# Altium PCB project_V3.PcbDoc
Units mil, origin at the board's own origin, x right, y up, seen from the top; angles counter-clockwise.
Board outline 1284.21 x 2285.52 mil, 2 copper layers (Top Layer, Bottom Layer); 38 components, 28 nets, 190 pads, 46 vias.
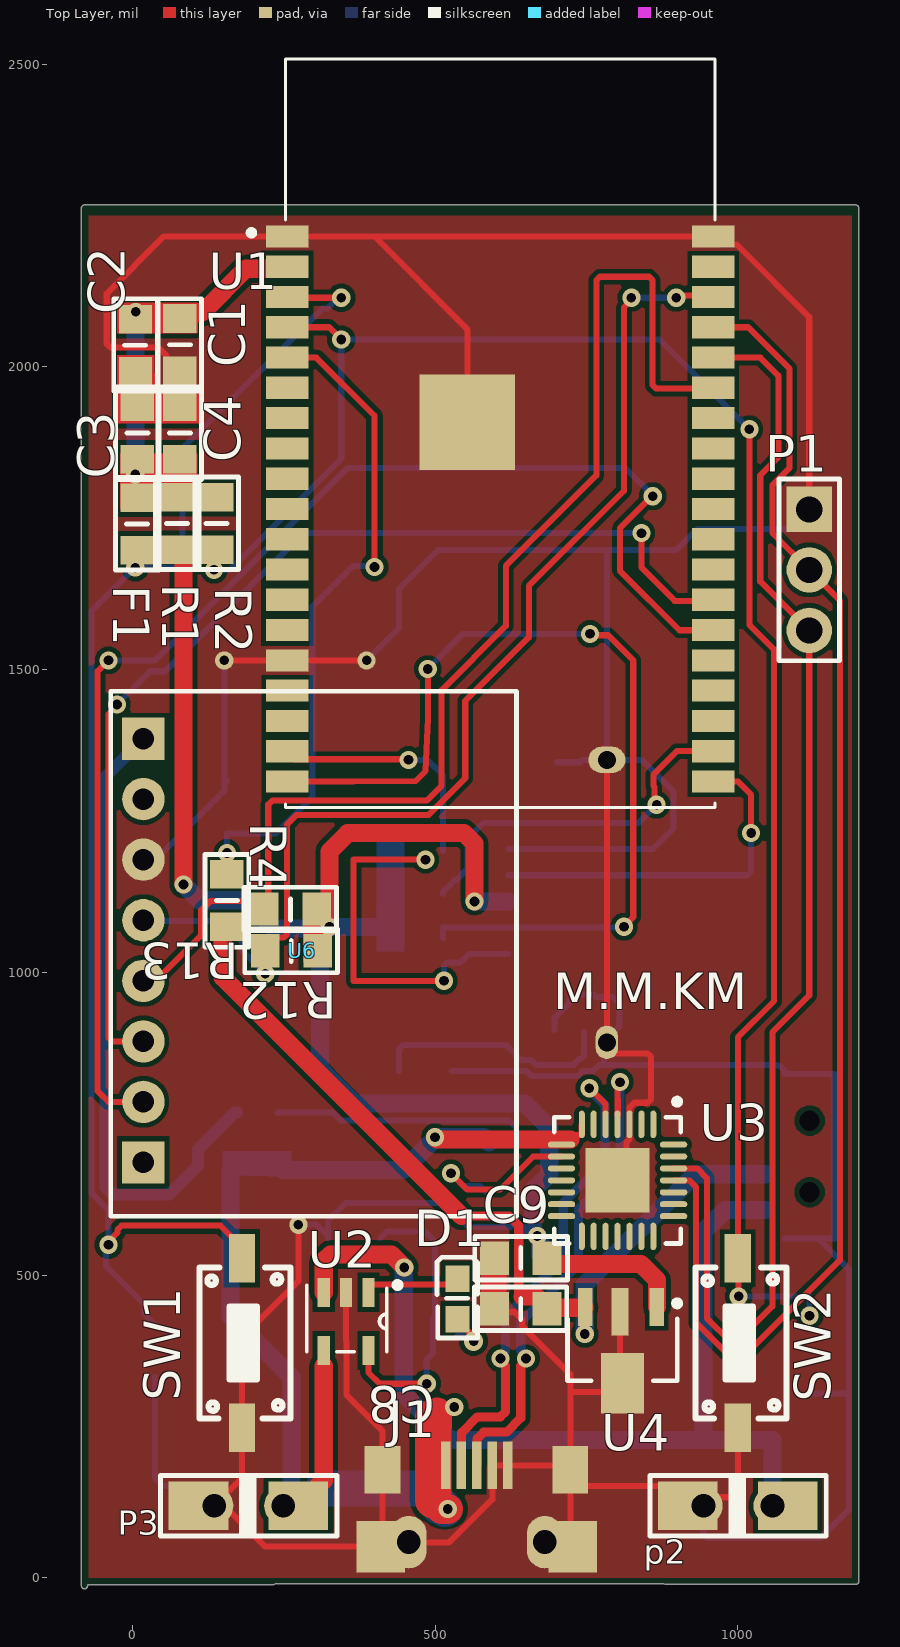
[diagram p0: Top Layer view]
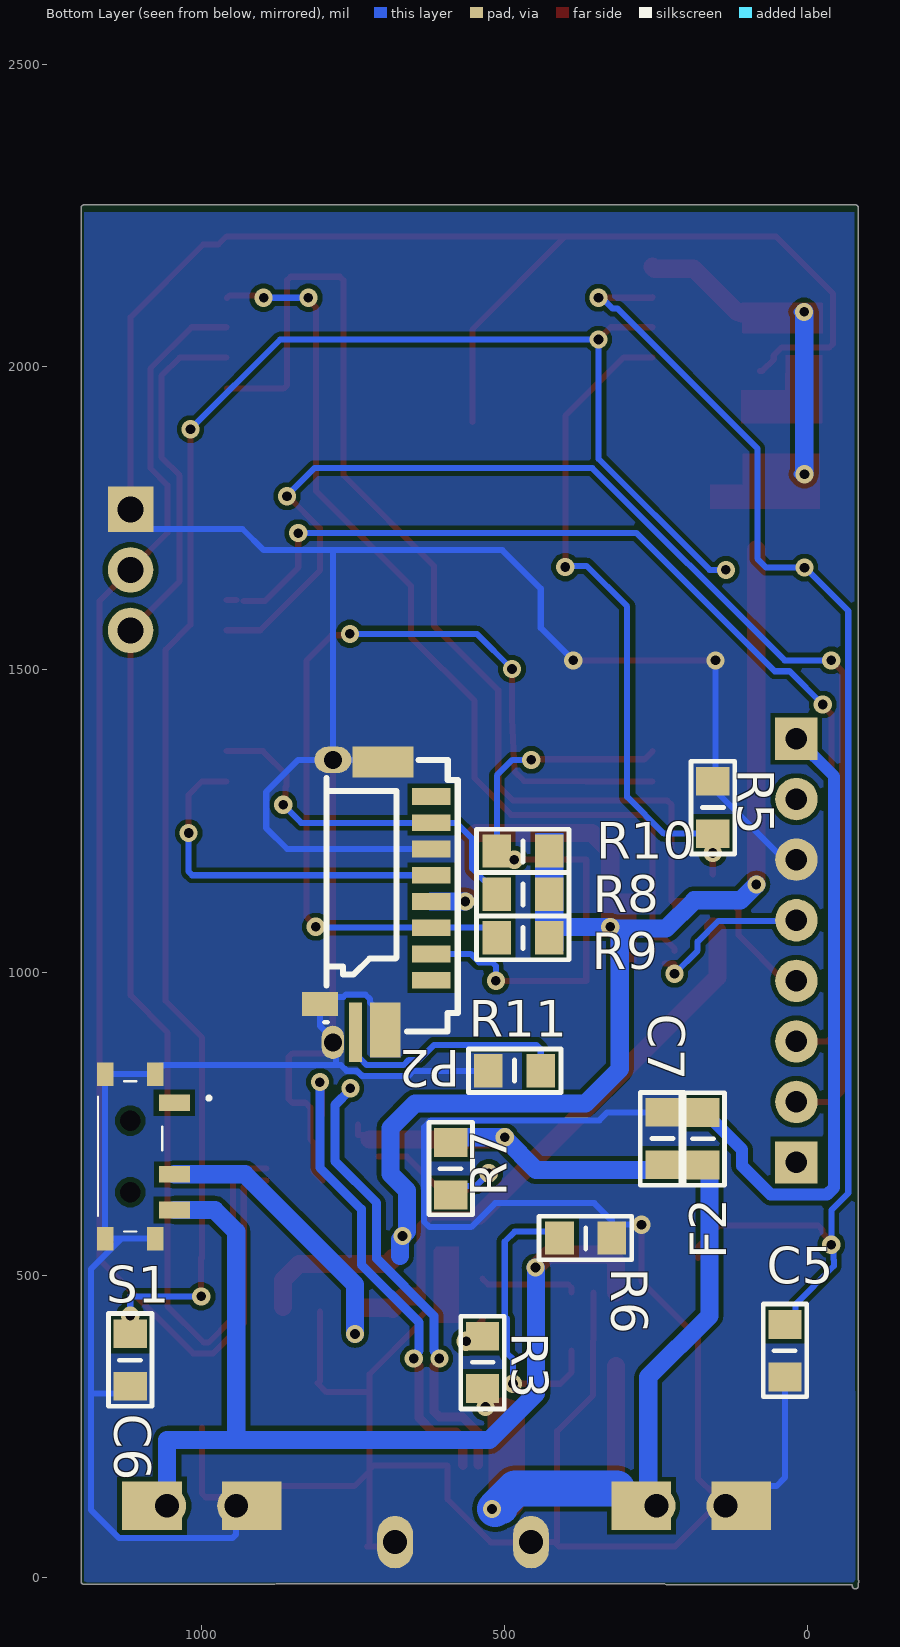
[diagram p1: Bottom Layer view, seen from below]

## Layer stack, top to bottom
Top Solder: solder mask 0.4, Solder Resist, Dk 3.5
Top Layer: signal copper 1.4
Dielectric 1: dielectric 12.6, FR-4, Dk 4.8
Bottom Layer: signal copper 1.4
Bottom Solder: solder mask 0.4, Solder Resist, Dk 3.5

## Board outline
-83.9,-8.34 cw(c-79.53,-5.87) -83.9,-3.41 -83.9,2262.37 cw(c-78.89,2262.37) -78.89,2267.39 238.19,2267.39 880.54,2267.39 1194.65,2267.39 cw(c1194.65,2262.37) 1199.66,2262.37 1199.66,-5.63 cw(c1194.65,-5.63) 1194.65,-10.64 879.89,-10.64 877.13,-9.82 236.46,-9.82 233.36,-10.89 -73.87,-10.89 -73.87,-13.14 cw(c-78.89,-13.14)

## Design rules (kind name [scope] priority, off if disabled: settings)
Clearance Clearance_1 [All] p1: gap=8 ignorepadtopadclearanceinfootprint=TRUE
Clearance POLYGON [InPolygon] p2: gap=25 ignorepadtopadclearanceinfootprint=FALSE except(0: Arc-Hole Track-Hole SMDPad-Hole THPad-Hole Via-Hole Fill-Hole Poly-Hole Region-Hole Text-Hole)
Clearance [All] p3: gap=8 ignorepadtopadclearanceinfootprint=FALSE except(12: Arc-Fill Arc-Poly Arc-Region Track-Fill Track-Poly Track-Region SMDPad-Fill SMDPad-Poly SMDPad-Region THPad-Fill THPad-Poly THPad-Region Via-Fill Via-Poly Via-Region Fill-Fill Fill-Poly Fill-Region Poly-Poly Poly-Region Region-Region)
ComponentClearance [All] p1: gap=0 collisioncheckmode=3 verticalgap=0 showdistances=FALSE
DiffPairsRouting [All] p1: maxlimit=10 minlimit=10 mostfreqgap=10 toplayer_minwidth=15 toplayer_maxwidth=15 toplayer_prefwidth=15 bottomlayer_minwidth=15 bottomlayer_maxwidth=15 bottomlayer_prefwidth=15 maxuncoupledlength=500
HoleSize [IsVia] p1: absolutevalues=TRUE maxlimit=30 minlimit=9 maxpercent=80.000 minpercent=20.000
PlaneConnect [All] p1: planeconnectstyle=Direct reliefexpansion=20 reliefentries=4 reliefconductorwidth=10 reliefairgap=10
PolygonConnect [All] p1: connectstyle=Direct reliefconductorwidth=10 reliefentries=4 polygonreliefangle="90 Angle" airgapwidth=10
RoutingVias [All] p1: holewidth=28 width=50 viastyle="Through Hole" minholewidth=28 minwidth=50 maxholewidth=28 maxwidth=50
SolderMaskExpansion [All] p1: expansion=4 istentingtop=FALSE
UnRoutedNet [All] p1: checkbadconnections=TRUE
Width [All] p1: maxlimit=196.85 minlimit=10 preferedwidth=10 minimp=50.000000 maximp=50.000000 favimp=50.000000
25 further rules are at their usual default settings.

## Classes and differential pairs
differential pair D: +D_P -D_N

## Components (designator, comment, footprint, x,y, rotation, side; value= is the part's Value field where it differs from the comment)
C1 "22uF" "0805 - CAP - duplicate" 78.4,2036.53 r90 top locked
C2 "100nF" "0805 - CAP - duplicate" 5.37,2035.53 r270 top locked
C3 "100nF" "0805 - CAP - duplicate" 78.4,1890.49 r90 top locked
C4 "100nF" "0805 - CAP - duplicate" 8.41,1890.49 r90 top locked
C5 "1uF" "0805 - CAP - duplicate" 37.33,375.18 r270 bottom locked
C6 "1uF" "0805 - CAP - duplicate" 1118.46,359.66 r270 bottom locked
C7 "10uF" "0805 - CAP - duplicate" 240.1,725.49 r90 bottom locked
C8 "10uF" "0805 - CAP - duplicate" 641.57,444.57 r0 top locked
C9 "10uF" "0805 - CAP - duplicate" 641.57,528 r180 top locked
D1 "RED" "0603 -LED_GREEN" 536.82,427.21 r90 top locked
F1 "Ferrite Bead" "0805 - CAP - duplicate" 74.57,1741.24 r270 top locked value=1K
F2 "Ferrite Bead" "0805 - CAP - duplicate" 173.2,725.31 r90 bottom locked value=1K (schematic designator F3)
J1 "MICRO USB 5PIN" "MICRO USB Dip_5pin - duplicate" 517.82,186 r0 top locked
P1 "Header 3" HDR1*3 1117.94,1764.69 r270 top locked
p2 "Battery" "HDR1X2_SMD - THD" 1000,119.17 r0 top locked
P2 "NANO SD CARD (MUP M617-2)" NANO_SDCARD 585.55,1350.7 r270 bottom locked
P3 "5V  input" "HDR1X2_SMD - THD" 191.82,119.17 r0 top locked
R1 "10k" "0805 - CAP - duplicate" 8.41,1740.64 r270 top locked
R2 "10k" "0805 - CAP - duplicate" 139.28,1741.24 r270 top locked
R3 "1K" "0805 - CAP - duplicate" 536.82,356.15 r90 bottom locked
R4 "100K" "0805 - CAP - duplicate" 156.26,1118.58 r90 top locked
R5 "420K" "0805 - CAP - duplicate" 156.26,1272.48 r90 bottom locked
R6 "1.65K" "0805 - CAP - duplicate" 366.38,561.37 r180 bottom locked
R7 "1K" "0805 - CAP - duplicate" 589.18,675.71 r270 bottom locked
R8 "47K" "0805 - CAP - duplicate" 469.81,1129.09 r180 bottom locked
R9 "47K" "0805 - CAP - duplicate" 469.81,1056.94 r180 bottom locked
R10 "47K" "0805 - CAP - duplicate" 469.81,1200.36 r180 bottom locked
R11 "47K" "0805 - CAP - duplicate" 483.91,837.51 r0 bottom locked
R12 "10k" "0805 - CAP - duplicate" 262.72,1035.5 r0 top locked
R13 "10k" "0805 - CAP - duplicate" 261.38,1104.62 r0 top locked
S1 "MSK12C02" SW_ON-OFF_MSK12C02 1045.46,785.06 r270 bottom locked
SW1 "KFC-6X6X4.5-4P" PUSH_BUTTON_SMD 181,388 r90 top locked
SW2 "KFC-6X6X4.5-4P" PUSH_BUTTON_SMD 1000,388 r90 top locked
U1 "ESP32_WROVER" ESP32-WROVER-I 607.64,1765.28 r0 top locked
U2 "LTC4054" TSOT-23-5 353.12,423.65 r270 top locked
U3 "CP2102" QFN28 801.35,656.53 r270 top locked
U4 "RT9166A-33GX" "SOT89 (RT9166)" 868.32,443.65 r180 top locked
U6 "GY-87" GY-87 -35.58,597.11 r90 top locked

## Footprints (in the part's own frame and the unit in brackets; to place one, negate y for a bottom-side part, rotate by r counter-clockwise, add the part's x,y. Pads: shape width x height; smd on the part's side, far side on the other; paste and mask are expansions set on the pad)
"0603 -LED_GREEN" [mm]
  rect 1.1x1 smd: 1(0,0) 2(1.7,0)
  silkscreen extent -0.79,-0.84 2.6,0.85, body extent -0.16,-0.65 1.86,0.6, height 1.1
"0805 - CAP - duplicate" [mm]
  rect 1.2x1.4 smd: 1(-1.1,0) 2(1.1,0)
  silkscreen extent -1.96,-0.91 1.93,0.91, body extent -1.01,-0.6 0.99,0.65, height 0.3
ESP32-WROVER-I [mm]
  rect 1.778x0.93 smd: 1(-8.937,11.43) 2(-8.937,10.16) 3(-8.937,8.89) 4(-8.937,7.62) 5(-8.937,6.35) 6(-8.937,5.08) 7(-8.937,3.81) 8(-8.937,2.54) 9(-8.937,1.27) 10(-8.937,0) 11(-8.937,-1.27) 12(-8.937,-2.54) 13(-8.937,-3.81) 14(-8.937,-5.08) 15(-8.937,-6.35) 16(-8.937,-7.62) 17(-8.937,-8.89) 18(-8.937,-10.16) 19(-8.937,-11.43) 20(8.937,-11.43) 21(8.937,-10.16) 22(8.937,-8.89) 23(8.937,-7.62) 24(8.937,-6.35) 25(8.937,-5.08) 26(8.937,-3.81) 27(8.937,-2.54) 28(8.937,-1.27) 29(8.937,0) 30(8.937,1.27) 31(8.937,2.54) 32(8.937,3.81) 33(8.937,5.08) 34(8.937,6.35) 35(8.937,7.62) 36(8.937,8.89) 37(8.937,10.16) 38(8.937,11.43)
  rect 4x4 smd paste-3: 39(-1.38,3.64)
  silkscreen extent -10.56,-12.53 9,18.87, body extent -9,-12.52 9,18.88, height 3.65
GY-87 [mil]
  rect 70x70 hole 35.43: 1(789,-54) 8(89,-54)
  round 70 hole 35.43: 2(689,-54) 3(589,-54) 4(489,-54) 5(389,-54) 6(289,-54) 7(189,-54)
  round 0 on Mech13: ""(753.46,-577.58)
  silkscreen extent 0,-670 867,0, body extent 36,-614 836,-14, height 220
HDR1*3 [mil]
  rect 75x75 hole 43: 1(0,0)
  round 75 hole 43: 2(100,0) 3(200,0)
  silkscreen extent -50,-50 250,50, body extent -50,-49 250,49, height 336
"HDR1X2_SMD - THD" [mm]
  rect 2.5x2.032 smd: 1(-2.095,0) 2(2.095,0)
  rect 2.5x2.032 smd far side: 1(-2.095,0) 2(2.095,0)
  round 1.6 hole 1: 1(-1.435,0) 2(1.461,0)
  silkscreen extent -3.69,-1.3 3.71,1.3
"MICRO USB Dip_5pin - duplicate" [mm]
  round 0 on Drill Drawing: 0(-0.741,-1.063)
  rect 0.4x2 smd: 1(0,0) 2(0.651,0.008) 3(1.3,0) 4(1.95,0) 5(2.6,0)
  rect 2.032x2.159 smd: 5(-2.728,-3.41) 5(5.323,-3.41)
  rect 1.5x2 smd: 5(-2.652,-0.185) 5(5.222,-0.185)
  oval 1.5x2.2 hole 1: 5(-1.554,-3.222) 5(4.149,-3.222)
  body extent -4.59,-30.64 7.41,0.29, height 5.5
NANO_SDCARD [mm]
  rect 0.7x1.6 smd: 1(9.233,-0.909) 2(8.133,-0.909) 3(7.033,-0.909) 4(5.933,-0.909) 5(4.833,-0.909) 6(3.733,-0.909) 7(2.633,-0.909) 8(1.533,-0.909)
  rect 2.5x0.55 smd: CD1(11.418,-4.08)
  rect 1.016x1.5 smd: CD2(10.236,-5.572)
  oval 1.1x1.55 hole 0.75: SHELL(-0.007,-5.035)
  rect 1.3x2.57 smd: SHELL(0.093,-2.935)
  rect 2.3x1.27 smd: SHELL(11.318,-2.845)
  oval 1.397x0.94 hole 0.75: SHELL(11.843,-5.035)
  silkscreen extent -0.01,-5.38 11.39,0.2, body extent 0.06,-15.75 11.46,0.02, height 3.85
PUSH_BUTTON_SMD [mil]
  rect 80x43.31 smd: 1(140,0) 2(-140,0)
  silkscreen extent -125,-80 125,70, body extent -153,-73 162,64, height 165
QFN28 [mm] "QFN, 28-Leads, Body 5/00x5/00mm, Pitch 0/50mm, Thermal Pad 3/13x3/20mm, IPC Low Density"
  oval 1.15x0.25 smd: 1(-2.35,1.5) 2(-2.35,1) 3(-2.35,0.5) 4(-2.35,0) 5(-2.35,-0.5) 6(-2.35,-1) 7(-2.35,-1.5) 15(2.35,-1.5) 16(2.35,-1) 17(2.35,-0.5) 18(2.35,0) 19(2.35,0.5) 20(2.35,1) 21(2.35,1.5)
  oval 0.25x1.15 smd: 8(-1.5,-2.35) 9(-1,-2.35) 10(-0.5,-2.35) 11(0,-2.35) 12(0.5,-2.35) 13(1,-2.35) 14(1.5,-2.35) 22(1.5,2.35) 23(1,2.35) 24(0.5,2.35) 25(0,2.35) 26(-0.5,2.35) 27(-1,2.35) 28(-1.5,2.35)
  rect 2.7x2.7 smd: EXP(0,0)
  silkscreen extent -3.42,-2.65 2.65,2.65, body extent -2.5,-2.5 2.5,2.5, height 1
"SOT89 (RT9166)" [mm] "SOT89, 3-Leads, Body 4.5x2.4 mm, Pitch 1.5mm, Lead Span 4.1mm, IPC High Density"
  rect 0.6x1.6 smd: 1(3.05,-0.1) 2(0.05,-0.1)
  rect 1.8x2.54 smd: 3(1.5,3.1)
  rect 0.7x2 smd: 3(1.6,0.1)
  silkscreen extent -0.93,-0.37 3.8,3, body extent -0.8,0.4 3.8,3, height 1.6
SW_ON-OFF_MSK12C02 [mm]
  rect 0.7x1.3 smd: A1(0.011,-0.004) B1(3.011,-0.004) C1(4.511,-0.004)
  round 0.425 hole 0.85 unplated: MH1(0.761,-1.854) MH2(3.761,-1.854)
  rect 1x0.7 smd: MP1(5.711,-0.804) MP2(5.711,-2.904) MP3(-1.189,-2.904) MP4(-1.189,-0.804)
  silkscreen extent -0.89,-3.2 5.41,1.5, body extent -1.69,-4.75 6.21,0.64, height 1.4
TSOT-23-5 [mil]
  rect 48x20 smd: 1(-48,37) 2(-48,0) 3(-48,-37) 4(48,-37) 5(48,37)
  silkscreen extent -65,-65 50,90, body extent -64,-60 64,60, height 43

## Part data
C1 C2 C3 C4 C5 C6 C8 C9: library part Cap, "Capacitor", LatestRevisionDate=17-Jul-2002, LatestRevisionNote="Re-released for DXP Platform.", PackageDescription="Radial Cap, Thru-Hole; 2 Leads; 0.3 in Pin Spacing", PackageReference=RAD-0.3, Published=8-Jun-2000, Publisher="Altium Limited"
C7: library part "C SMD", "Ceramic Chip Capacitor - Standard", PackageDocument=Mar-2001, Code_IPC="1608 [0603]", Code_JEITA=0603, ComponentLink1Description="Manufacturer Link", ComponentLink1URL=http://www.kemet.com/, ComponentLink2Description=Datasheet, ComponentLink2URL=http://www.kemet.com/kemet/web/homepage/kechome.nsf/vapubfilesname/F3102TA.pdf/$file/F3102TA.pdf, DatasheetDocument=Mar-2001, LatestRevisionDate=19-Mar-2004, LatestRevisionNote="Silkscreen size reduced.", Note="Footprint corresponds to dimensions for bulk cassette packaging. This case size has tightened tolerances.", PackageReference=0603, Published=17-Jul-2002, Publisher="Altium Limited"
D1: library part "LED SMD"
F1 F2: library part Res2, "Resistor", LatestRevisionDate=17-Jul-2002, LatestRevisionNote="Re-released for DXP Platform.", PackageReference=AXIAL-0.4, Published=8-Jun-2000, Publisher="Altium Limited"
J1: "USB 1.1, Right Angle, Thru-Hole, Series A, Reverse Type, Receptacle, 4 Position, Black", PackageDocument=08-Sep-2003, ComponentLink1Description="Manufacturer Link", ComponentLink1URL=http://www.tycoelectronics.com/, ComponentLink2Description="Packaging Specification", ComponentLink2URL=http://ecommas.tycoelectronics.com/commerce/DocumentDelivery/DDEController?Action=showdoc&DocId=Customer+Drawing%7F440314%7FF%7Ftif%7FEnglish%7FC_440314_F.tif, ContactMaterial="Copper Alloy", ContactPlating="Gold (30)", DatasheetDocument=08-Sep-2003, DrillSize="Corresponds to nominal value.", HousingMaterial="Glass-Filled Thermoplastic", PackageReference=440314, PanelGround=Without, PCB_Layout="Complies with manufacturer's recommendation.", Published=15-Jul-2004, Publisher="Altium Limited", TerminationLength="2.79mm [0.110in.]"
P1: "Header, 3-Pin", LatestRevisionDate=17-Jul-2002, LatestRevisionNote="Re-released for DXP Platform.", Publisher="Altium Limited"
p2: "Multicell Battery", LatestRevisionDate=17-Jul-2002, LatestRevisionNote="Re-released for DXP Platform.", PackageDescription="Battery; 2 Leads", PackageReference=BAT-2, Published=24-Mar-1999, Publisher="Altium Limited"
P2: library part Nano_SDCard
P3: library part "Header 2", "Header, 2-Pin", LatestRevisionDate=17-Jul-2002, LatestRevisionNote="Re-released for DXP Platform.", Publisher="Altium Limited"
R1 R2 R3 R4 R5 R6 R7 R8 R9 R10 R11 R12 R13: library part Res1, "Resistor", LatestRevisionDate=17-Jul-2002, LatestRevisionNote="Re-released for DXP Platform.", PackageDescription="Axial Device, Thru-Hole; 2 Leads; 0.3 in Pin Spacing", PackageReference=AXIAL-0.3, Published=8-Jun-2000, Publisher="Altium Limited"
S1: library part MSK12C02_1, "Switch", Manufacturer_Name="Shou Han", Datasheet Link=https://shouhan.en.made-in-china.com/product/xsMEmqgOAXWB/China-Slide-Switch-Msk12c02-Slide-Switch-on-off-2-Position-1p2t-Spdt-Miniature-Horizontal-SMD-7p-Slide-Switch.html, Height=1.4mm, Manufacturer_Part_Number=MSK12C02
SW1 SW2: library part "Push Bottun"
U2: "Standalone Linear  Li-Ion Battery Charger with  Thermal Regulation in ThinSOT", linear datasheet=http://www.linear.com/docs/2288, mahdi zamani=23.aug.2017
U3: library part CP2102N-A01-GQFN20R, "Integrated Circuit", Manufacturer_Name="Silicon Labs", Mouser Part Number=634-CP21NA01GQFN20R, Arrow Part Number=CP2102N-A01-GQFN20R, Arrow Price/Stock=https://www.arrow.com/en/products/cp2102n-a01-gqfn20r/silicon-labs, Datasheet Link=http://www.silabs.com/documents/public/data-sheets/cp2102n-datasheet.pdf, Height=0.8mm, Manufacturer_Part_Number=CP2102N-A01-GQFN20R, Mouser Price/Stock=https://www.mouser.co.uk/ProductDetail/Silicon-Labs/CP2102N-A01-GQFN20R?qs=eDRjYdeUVVk8quRq31jmtA%3D%3D
U4: "REGULATOR 3.3V", Manufacturer_Name=Vishay, Manufacturer_Part_Number=2N7002, Mouser Part Number=781-2N7002, RS Part Number=2370907P, Datasheet Link=https://www.diodes.com/assets/Datasheets/ds11303.pdf, Height=1.2mm, Mouser Price/Stock=https://www.mouser.com/Search/Refine.aspx?Keyword=781-2N7002, RS Price/Stock=http://uk.rs-online.com/web/p/products/2370907P
U6: "Gyroscope Module                                                                         #include <Wire.h> / #include <Adafruit_MPU6050.h> /  / Adafruit_MPU6050 mpu; /  / void setup() { /   Wire.begin(); /   mpu.begin(); / } /  / void loop() { /   sensors_event_t a, g, temp; /   mpu.getEvent(&a, &g, &temp); /  /   float accelerationX = a.acceleration.x; /   float accelerationY = a.acceleration.y; /   float accelerationZ = a.acceleration.z; /  /   float gyroX = g.gyro.x; /   float gyroY = g.gyro.y; /   float gyroZ = g.gyro.z; /  /   float temperature = temp.temperature; /  /   // Process sensor data here /  /   delay(100); / }*/"

## Via types
v1: diameter 30, hole 16, Top Layer to Bottom Layer, 45 vias
v2: diameter 31.5, hole 15.75, Top Layer to Bottom Layer, 1 vias

## Nets (pads, with @x,y where several pads share a name; then routed paths per layer and width w, separated by ;. In a path a pad name is that pad's centre, name@x,y a point inside that pad or via, vN(x,y) a via of type N, cw(c..) or ccw(c..) an arc to the next point about the centre after c; other vN are vias at no path point)
5V: C7.1 F2.1 J1.1 P3.2 R3.1 R7.1 U2.4 U3.7 U3.8 | length 2065.6
  Top Layer w10: 719.78,727.64 723.56,731.42 742.22,731.42 742.3,731.49 U3.7
  Top Layer w30: P3.2@274.31,119.17 316.12,160.98 316.12,349.84 ; v1(500,727.64) 503.61,724.03 708.83,724.03 723.4,724.03
  Top Layer w50: 502.56,250.55 503.31,251.3 503.31,272.69 ; v1@511.1,114 v1(521,114)
  Top Layer w60: 496.83,128.27 496.83,186 496.83,265.24
  Bottom Layer w30: P3.2@249.32,119.17 P3.2@274.31,119.17 ; P3.2@281.43,112.05 P3.2@274.31,119.17 ; P3.2@314.94,147.61 311.5,144.17 299.31,144.17 P3.2@274.31,119.17 ; R7.1 580.56,727.64 v1(500,727.64) 500,725.54 448.02,673.56 248.72,673.56 C7.1 240.01,682.09 173.28,682.09 F2.1 170.66,682.01 162.04,673.38 162.04,432.98 263.15,331.87 263.15,130.33 P3.2@274.31,119.17
  Bottom Layer w50: 504.03,114 516.05,114 v1(521,114)
  Bottom Layer w60: P3.2@314.94,147.61 482.44,147.61 v1@516.05,114
  other v1: 531.74,282.26
"ADC-CH 0_ TO_GPIO3": R4.2 R5.1 U1.5 | length 1113.4
  Top Layer w10: R4.2 156.52,1162.15 v1(156.52,1197.27) ; U1.5 304,2015.28 400,1919.28 v1(400,1669.28)
  Bottom Layer w10: v1(156.52,1197.27) 156.52,1228.91 R5.1 237.17,1229.17 297.91,1289.91 297.91,1604.27 365,1671.36 397.93,1671.36 v1(400,1669.28)
BATTRY_4.2V: C8.2 R4.1 S1.B1 U4.1 | length 1426
  Top Layer w15: 543.43,597.48 622.23,597.48 638.25,581.46 638.25,468.29
  Top Layer w30: R4.1 148.9,1067.91 148.9,992.02 543.43,597.48 ; 644.88,464.97 666.02,464.97 672.36,460.11 678.24,454.23 679.8,451.95 C8.2 686.38,446.08 U4.1@746.73,446.08
  Bottom Layer w30: v1(747.21,402.96) 747.21,484.61 929.13,666.54 S1.B1
CHARGE_BATTERY_STATUS: D1.2 U2.1 | length 160.7
  Top Layer w10: U2.1 390.12,479.61 395.12,484.61 527.29,484.61 D1.2
D_N: J1.2 U3.5 | length 797.1
  Top Layer w10: v1(754.89,808.73) 755.37,808.73 781.67,782.43 U3.5@781.67,766.69
  Top Layer w15: J1.2@543.76,186.64 543.81,186.68 543.81,239.74 569.94,265.87 607.78,265.87 616.57,274.66 616.57,349.84
  Bottom Layer w15: v1(607.96,362.51) 607.96,366.57 616.57,375.18 616.57,432.46 711.66,527.56 711.66,619.41 780.33,688.07 780.33,781 754.89,806.44 v1(754.89,808.73)
D_P: J1.3 U3.4 | length 801.1
  Top Layer w10: U3.4@801.43,763.31 801.67,763.55 801.67,790.71 801.43,790.95 801.43,801.45 801.51,801.52 801.51,814.99 v1(805.33,818.82)
  Top Layer w15: J1.3 569.37,186.37 569.37,229.95 580.29,240.87 618.14,240.87 641.57,264.3 641.57,349.84
  Bottom Layer w15: v1(650.18,362.51) 650.18,366.57 641.57,375.18 641.57,422.1 736.66,517.2 736.66,609.05 805.33,677.72 805.33,758.07 v1(805.33,818.82)
ESP32_0: C6.1 R2.2 SW2.1 U1.4 | length 2940.4
  Top Layer w10: U1.4 325,2065.28 v1(345.14,2045.14) ; v1(1001.27,464.97) 1001.27,528 SW2.1 1000,892.72 1060,952.72 1060,1533 1019,1574 v1(1019,1897)
  Bottom Layer w10: v1(134.92,1664.69) 161.66,1664.69 345.14,1848.18 v1(345.14,2045.14) 870.86,2045.14 v1(1019,1897) ; v1(1001.27,464.97) 1118.46,464.97 v1(1118.46,432.98)
ESP32_33_FSYNC_GY87: U1.26 U6.6 | length 1786.1
  Top Layer w10: v1(-25.24,1442.42) -25.24,1440.51 -39.19,1426.56 -39.19,891.97 -33.34,886.11 U6.6 ; v1(841.03,1725.36) 841.03,1668.23 895.64,1613.62 U1.26@931,1613.62 ; U1.26@942.8,1615.28 U1.26
  Bottom Layer w10: v1(-25.24,1442.42) 29.61,1497.28 54.19,1497.28 282.27,1725.36 v1(841.03,1725.36)
ESP32_35_FSYNC_GY87_EXTI: U1.25 U6.7 | length 2193.4
  Top Layer w10: v1(-39.19,1515.28) -57.09,1497.38 -57.09,1450.17 -57.19,1450.07 -57.19,842.16 -57.11,842.08 -57.11,804.03 -39.19,786.11 U6.7 ; v1(859.52,1786.24) 857.98,1786.24 805.33,1733.58 805.33,1663.29 903.69,1564.93 959.14,1564.93 U1.25
  Bottom Layer w10: v1(-39.19,1515.28) 37.7,1515.28 355.18,1832.76 814.54,1832.76 859.52,1787.78 v1(859.52,1786.24)
ESP32_EN: C5.1 R1.2 SW1.1 U1.3 | length 2321.1
  Top Layer w10: v1(-39.19,550.11) -39.19,555.52 -24.5,570.21 -24.5,574.93 -17.43,582 145.35,582 181,546.35 SW1.1 ; U1.3 257.03,2114.04 v1(345.14,2114.04)
  Bottom Layer w10: C5.1 20.26,435.56 20.26,451.25 -43.6,515.11 -43.6,525.11 -43.02,525.69 -43.02,546.28 v1(-39.19,550.11) -39.19,607.5 -67.19,635.5 -67.19,1597.09 4.04,1668.32 68.19,1668.32 83,1683.14 83,1865.41 313.64,2096.05 321.74,2096.05 339.73,2114.04 v1(345.14,2114.04)
  other v1: 5,1668.32
ESP_3.3V: C9.1 F1.2 P2.4 R8.2 R9.2 R10.2 R12.2 R13.2 U4.2 | length 2602.8
  Top Layer w30: v1(84.46,1145.18) 84.57,1145.29 F1.2@84.57,1697.94 ; v1(325.69,1075.11) 325.69,1199.75 355.97,1230.03 547.46,1230.03 565.03,1212.46 v1(565.03,1117.11) ; C9.1 684.87,527 693.5,518.38 839.89,518.38 866.35,491.91 U4.2
  Bottom Layer w10: R8.2@407.88,1106.53 426.51,1125.15 R8.2 ; R9.2@415.5,1075.11 426.51,1086.11
  Bottom Layer w30: v1(84.46,1145.18) 110.64,1119 187.02,1119 233.72,1072.3 309.97,1072.3 322.89,1072.3 v1(325.69,1075.11) R9.2@415.5,1075.11 ; 309.97,1059.39 309.97,840.44 366.78,783.64 648.15,783.64 688.6,743.2 688.6,666.79 661.52,639.72 661.52,571.95 v1(668.75,564.72) 668.75,563.13 673.08,558.8 673.08,532.1 ; v1(565.03,1117.11) P2.4
ESP_3.3VA: C1.2 C2.1 C3.1 C4.1 F1.1 R1.1 R2.1 U1.2 | length 481.2
  Top Layer w30: C1.2 87.02,2088.46 108.72,2088.46 110.64,2090.38 116.46,2090.38 188.05,2161.97 252.48,2161.97 U1.2
  Bottom Layer w15: v1@15,1822.61 v1@15.34,1822.95 ; v1@15.34,2090.38 v1@15.69,2090.72
  Bottom Layer w30: v1@5.34,1822.95 v1@5.34,2090.38
  other v1: 5,1822.61 5.69,2090.72
GND: C1.1 C5.2 C6.2 C7.2 C8.1 C9.2 J1.4 J1.5 P1.1 p2.1 P2.6 P2.CD2 P2.SHELL P3.1 R5.2 R6.2 R11.2 S1.MP1 S1.MP2 S1.MP3 S1.MP4 SW1.2 SW2.2 U1.1 U1.15 U1.38 U1.39 U2.2 U3.3 U3.EXP U4.3 U6.3 | length 11656.1
  Top Layer w10: C1.1 74.46,1993.22 55.84,2011.84 55.84,2018.9 42.74,2032 -36.26,2032 -42.12,2037.85 -42.12,2120.98 52.18,2215.28 U1.1 400,2215.28 ; P3.1@109.31,119.17 135.31,119.17 P3.1@152.62,136.48 ; v1(152,1515.28) U1.15 v1(387,1515.28) ; v1(274.31,583.34) 274.31,490.25 181,396.93 SW1.2 181,164.85 P3.1@152.62,136.48 ; U2.2 353.12,392.39 354.12,391.39 354.12,301.88 413.4,242.6 413.4,178.73 J1.5@413.4,59.17 ; J1.5@456.65,59.17 417.86,59.17 410.42,51.73 219.26,51.73 152.62,118.37 P3.1@152.62,136.48 ; J1.5@457.12,58.7 523.29,58.7 594.59,130 J1.4 620.18,186 716.13,186 J1.5@723.4,178.73 ; U1.39 553.31,2061.98 400,2215.28 ; C8.1 603.59,439.23 631.02,439.23 643.44,426.81 643.44,416.43 723.4,336.48 723.4,307 ; J1.5@681.16,59.17 688.6,51.73 727.4,51.73 723.4,55.73 J1.5@723.4,176.42 ; P2.SHELL@771.3,870.26 P2.SHELL@779.9,870.26 ; P2.SHELL@783.77,1350.97 783.77,1310.23 784,1310 784,893.23 783.77,893 783.77,884.43 783.77,870.26 796.24,870.26 800.11,866.4 850.82,866.4 856.67,860.54 856.67,790.55 850.82,784.69 828.92,784.69 821.04,776.81 U3.3 821.04,724.03 815.83,718.83 815.83,671.02 U3.EXP ; U4.3@805.33,439.72 805.33,325.55 809.27,321.61 794.66,307 723.4,307 ; p2.1@917.5,119.17 p2.1@943.5,119.17 ; SW2.2 1000,175.67 1000,139.15 994.14,133.29 957.63,133.29 p2.1@943.5,119.17 ; P1.1 1117.94,2081.96 997.92,2201.97 972.8,2201.97 U1.38 400,2215.28 ; J1.5@723.4,176.42 J1.5@723.4,178.73 ; J1.5@723.4,176.42 747.92,151.89 918.75,151.89 943.5,127.14 p2.1@943.5,119.17 ; J1.5@723.4,178.73 723.4,307
  Bottom Layer w10: C5.2 37.33,165.56 51.31,151.58 76.9,151.58 109.31,119.17 P3.1@135.31,119.17 ; U6.3@38.41,1186.11 152,1299.7 152,1315.78 R5.2 152,1320.04 v1(152,1515.28) ; C7.2 330.82,768.8 343.98,755.64 622.12,755.64 633.37,744.39 633.37,588.49 624.17,579.28 555.52,579.28 515.8,619 352.07,619 323.07,590 R6.2@323.07,564.72 ; v1(274.31,583.34) 304.45,583.34 R6.2@323.07,564.72 ; R6.2 R6.2@323.07,564.72 ; v1(387,1515.28) 440.6,1568.88 440.6,1633.77 504.12,1697.28 783.77,1697.28 ; R11.2 651.02,837.51 659.71,828.82 735.39,828.82 744.07,837.51 760.94,837.51 770.43,847 778.38,847 ; P2.6 859.52,1203.72 893.87,1238.07 893.87,1298.13 841.03,1350.97 P2.SHELL@783.77,1350.97 ; P2.SHELL@697.55,905.1 697.55,925.38 722.35,950.17 722.35,955.76 729.96,963.37 762.38,963.37 766.24,959.52 793.09,959.52 P2.CD2 804.91,911.38 778.97,885.44 778.97,852.86 ; P2.SHELL@701.09,1347.03 740,1347.03 743.94,1350.97 P2.SHELL@783.77,1350.97 ; 779.9,848.52 778.38,847 ; p2.1@917.5,119.17 943.5,119.17 943.5,72.03 949.36,66.17 1137.1,66.17 1183.38,112.45 1183.38,304.95 ; S1.MP1 1133.23,560.24 ; P1.1 1085.44,1732.19 933.11,1732.19 898.2,1697.28 783.77,1697.28 ; C6.2 1118.46,304.95 1183.38,304.95 ; 778.38,847 1062.49,847 1062.91,846.58 1068.35,846.58 1077.12,837.8 S1.MP4 S1.MP3 S1.MP2 1133.23,560.24 ; P2.SHELL@783.77,1350.97 783.77,1697.28 ; 1133.23,560.24 1183.38,510.09 1183.38,304.95
NetC2_2: C2.2 C3.2 C4.2 | length 158.2
  Top Layer w10: C4.2@5.37,1933.8 C4.2@15,1933.8 ; C2.2 C2.2@23.99,2010.84 ; C2.2@15.37,1992.22 15,1992.22 C4.2@15,1933.8 ; C3.2 C4.2@15,1933.8
NetD1_1: D1.1 R3.2 | length 77.8
  Top Layer w10: D1.1 536.82,425.24 559.58,402.48 559.58,395.04 v2(563.69,390.93)
  Bottom Layer w10: R3.2 555.16,399.46 v2(563.69,390.93)
NetF2_2: F2.2 U6.1 | length 1061.2
  Bottom Layer w20: U6.1 -44,1323.7 -44,644.83 -32.28,633.11 60.87,633.11 108.25,680.5 108.25,707.62 169.26,768.62 F2.2
NetP2_CD1: P2.CD1 R11.1 | length 403.1
  Bottom Layer w10: R11.1 440.6,873.23 447.69,880.31 616.69,880.31 641.49,855.51 658.48,855.51 667.16,846.82 727.93,846.82 738.06,856.95 740.35,856.95 746.17,862.78 P2.CD1
NetR6_1: R6.1 U2.5 | length 482.5
  Top Layer w10: U2.5 390.12,338.92 408.36,320.69 v1(486.26,320.69)
  Bottom Layer w10: R6.1 420.31,572 483.6,572 500,555.6 500,432.21 496.26,428.47 496.26,370.91 486.26,360.91 v1(486.26,320.69)
NetR7_2: R7.2 U3.9 | length 293.8
  Top Layer w10: v1(526.39,668.27) 553.25,641.4 607.3,641.4 661.72,695.83 708.75,695.83 U3.9
  Bottom Layer w10: v1(526.39,668.27) 547.6,647.05 574.53,647.05 R7.2
RXD_ESP32: P1.3 U1.34 U3.26 | length 2170.3
  Top Layer w10: U3.26 932.78,676.22 949,660 949,428.82 989.06,388.77 997.34,388.77 1057,448.43 1057,901.06 1117.94,962 P1.3 1037,1645.62 1037,1820.76 1067,1850.76 1067,1985.28 1037,2015.28 U1.34
"SCL_I2C1_GY-87 TO GPIO 22_N": R12.1 U1.36 U6.4 | length 1859.1
  Top Layer w10: R12.1 219.41,1038.75 238.03,1057.37 249.93,1057.37 255.79,1063.23 255.79,1244.53 271.36,1260.11 489.29,1260.11 549.86,1320.68 549.86,1448.23 655.02,1553.38 655.02,1638.34 812,1795.32 812,2098.18 824.24,2110.42 v1(824.24,2114.04) ; v1(219.7,997.75) 219.7,1012.94 221.27,1014.51 R12.1@236.46,1014.51 ; v1@898.2,2117.72 954.73,2117.72 U1.36@958.41,2114.04
  Bottom Layer w10: U6.4@37.33,1084.87 147.32,1084.87 181.6,1050.59 181.6,1035.86 v1(219.7,997.75) ; v1(824.24,2114.04) v1(898.2,2114.04)
"SDA_I2C1_GY-87 TO GPIO 21_P": R13.1 U1.33 U6.5 | length 2053.4
  Top Layer w10: U6.5@37.33,984.87 113.92,1061.45 113.92,1102.75 128.92,1117.75 R13.1@224.52,1117.75 ; R13.1 218.07,1111.3 R13.1@224.52,1117.75 ; U1.33@958.41,1964.04 865.18,1964.04 859.32,1969.89 859.32,2142.89 853.46,2148.75 772.21,2148.75 766.35,2142.89 766.35,1820.8 616.92,1671.37 616.92,1572.42 510.74,1466.24 510.74,1308.3 486.15,1283.7 231.35,1283.7 224.52,1276.87 R13.1@224.52,1117.75
SPI_CSN_SD: P2.2 R10.1 U1.18 | length 1006.3
  Top Layer w10: U1.18 269.1,1351.97 455.26,1351.97 v1(456.26,1350.97) ; v1(484.26,1186.11) 365.41,1186.11 365.41,986.11 v1(514.65,986.11)
  Bottom Layer w10: v1(456.26,1350.97) 487.44,1350.97 513.12,1325.28 R10.1 ; v1(514.65,986.11) 514.65,1010.53 520.5,1016.39 542.13,1016.39 556.24,1030.49 P2.2
SPI_MISO_SD: P2.7 R8.1 U1.21 | length 612.2
  Top Layer w10: v1(865.87,1276.87) 862.04,1280.7 862.04,1306.11 860.41,1307.75 860.41,1326.4 899.29,1365.28 U1.21
  Bottom Layer w10: R8.1 513.12,1133.02 531.74,1151.64 533.98,1151.64 554,1171.67 554,1221.03 580,1247.03 836.03,1247.03 v1(865.87,1276.87)
SPI_MOSI_SD: P2.3 R9.1 U1.19 | length 1548
  Top Layer w10: U1.19 365.41,1315.28 467.86,1316 484.26,1332.4 488.01,1419.66 v1(488.01,1500.98) ; v1(755.77,1559) 758.03,1556.73 785.77,1556.73 827.28,1515.22 827.28,1091.13 812,1075.85 v1(812,1075.27)
  Bottom Layer w10: v1(488.01,1500.98) 546.02,1559 v1(755.77,1559) ; R9.1 513.12,1073.8 P2.3 810.53,1073.8 v1(812,1075.27)
SPI_SCK_SD: P2.5 U1.20 | length 601.7
  Top Layer w10: U1.20 1000,1315.28 1022,1293.28 v1(1022,1230.03)
  Bottom Layer w10: P2.5 1016.14,1160.41 1022,1166.27 v1(1022,1230.03)
TXD_ESP32: P1.2 U1.35 U3.25 | length 2272.5
  Top Layer w10: U3.25 920,656.54 931,645.54 931,421.37 981.6,370.77 1014.49,370.77 1169,525.28 1169,1613.62 P1.2 1057,1725.62 1057,1804.76 1085,1832.76 1085,1997.28 1017,2065.28 U1.35
"V BAT": p2.2 S1.C1 U2.3 | length 1666.7
  Top Layer w10: p2.2@1057.51,119.17 p2.2@1082.5,119.17
  Top Layer w30: U2.3 316.12,523 327.12,534 427.78,534 v1(449.16,512.61)
  Bottom Layer w30: v1(449.16,512.61) 448.26,511.71 448.26,304.95 525.41,227.79 943.5,227.79 ; S1.C1 978.98,607.48 943.5,572 943.5,227.79 ; p2.2@1082.5,119.17 1057.51,119.17 1057.51,227.79 943.5,227.79
pads on no net: J1.0 P2.1 P2.8 S1.A1 S1.MH1 S1.MH2 U1.6 U1.7 U1.8 U1.9 U1.10 U1.11 U1.12 U1.13 U1.14 U1.16 U1.17 U1.22 U1.23 U1.24 U1.27 U1.28 U1.29 U1.30 U1.31 U1.32 U1.37 U3.1 U3.2 U3.6 U3.10 U3.11 U3.12 U3.13 U3.14 U3.15 U3.16 U3.17 U3.18 U3.19 U3.20 U3.21 U3.22 U3.23 U3.24 U3.27 U3.28 U6. U6.2 U6.8

## Polygon pours and split planes (outlines as drawn)
GND on Bottom Layer "GND_L02_P000" (solid, pour order 0): -76.87,2255.09 1194.56,2255.09 1194.56,-5.78 1194.73,-5.96 1193.99,-6.7 -78.89,-6.7
GND on Top Layer "GND_L01_P001" (solid, pour order 1): -71.94,2249.12 1188.12,2249.12 1188.12,0.12 -71.94,0.12

## Other copper
Top Layer:
  region net GND: 576.38,421.55 576.38,547.08 612.79,547.08 617.65,542.22 617.65,421.55
  region net NetC2_2: 36.06,2019 -24.68,2019 -24.68,1907.65 -25,1907.33 -24.36,1906.69 109.55,1906.69 109.55,1961.13 109.34,1961.35 36.83,1961.35
  region net ESP_3.3VA: -20.21,1856.11 -20.21,1765.28 160.92,1765.28 160.92,1804.94 107.15,1804.94 107.15,1856.38
  region net ESP_3.3V: 321.84,1016.87 325.69,1020.72 325.69,1129.49 284.09,1129.49 282.77,1128.17 282.77,1016.44
  region net ESP_3.3VA: 107.67,2105.72 -24.03,2105.72 -24.27,2105.96 -25,2105.24 -25,2055.21 106.71,2055.21 107.91,2056.42
Bottom Layer:
  region net ESP_3.3V: 449.42,1230.03 449.51,1229.95 449.51,1035.13 403.05,1035.13 403.43,1035.5 403.43,1229.66 447.53,1229.66 448.29,1228.9
  region net 5V: 149.28,704.24 149.74,704.7 262.35,704.7 262.35,669.91 263.2,669.07 262.35,662.88 149.28,665.31

## Silkscreen, mask and mechanical layers (free items; w line width, h text height)
Top Overlay:
  text "M.M.KM" at 694.87,939.11 h60